# EAGLE board Segway (EAGLE 6.5.0)
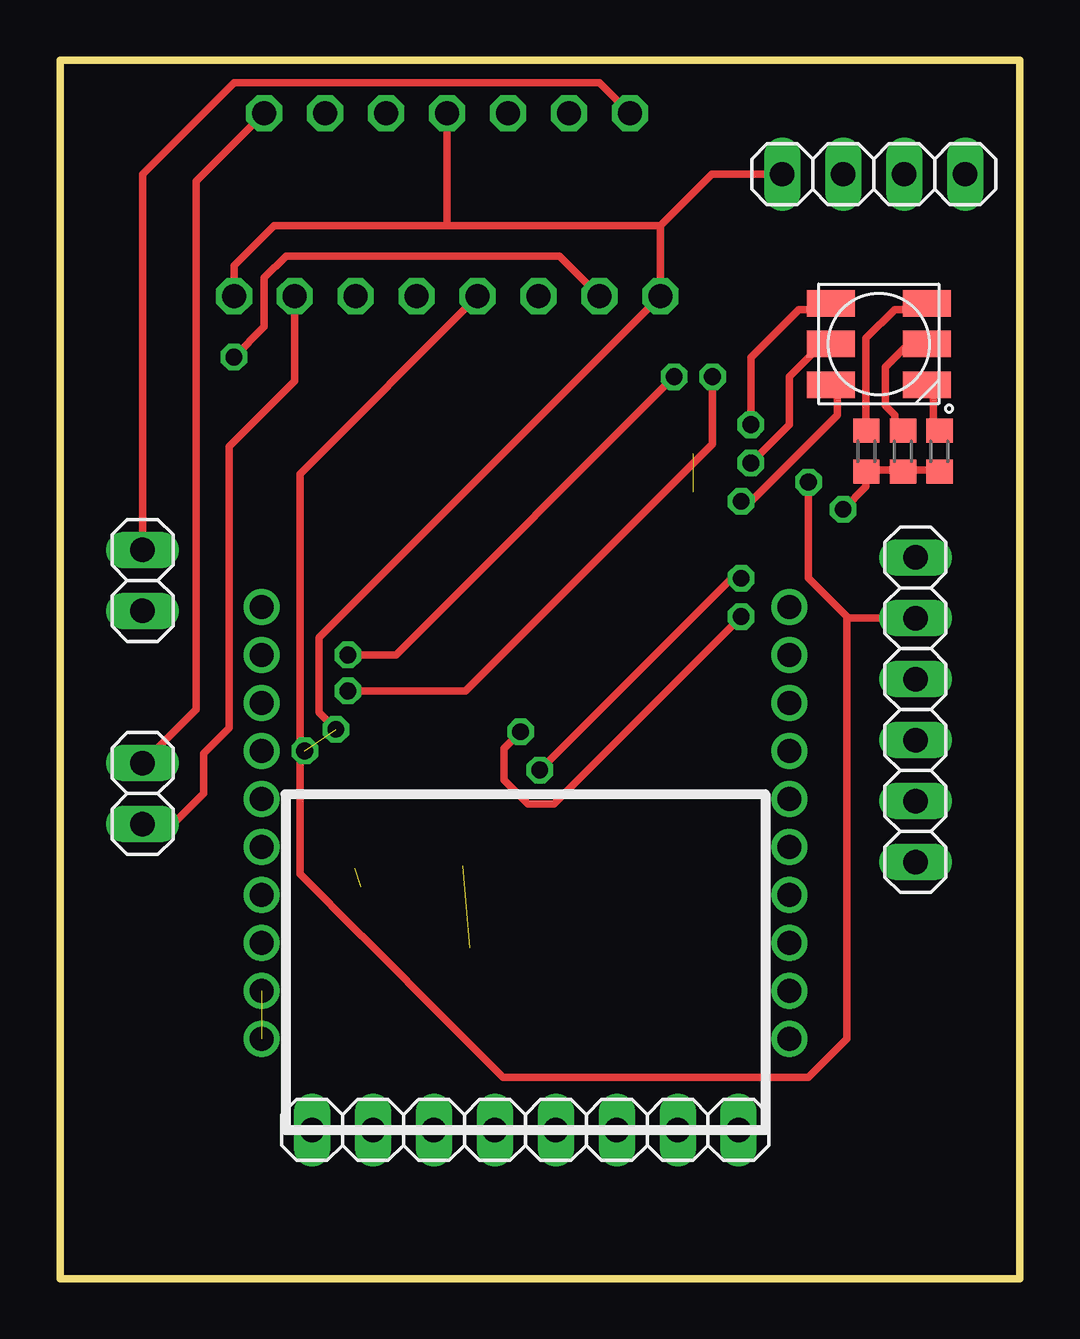
[diagram p0: board, top side]
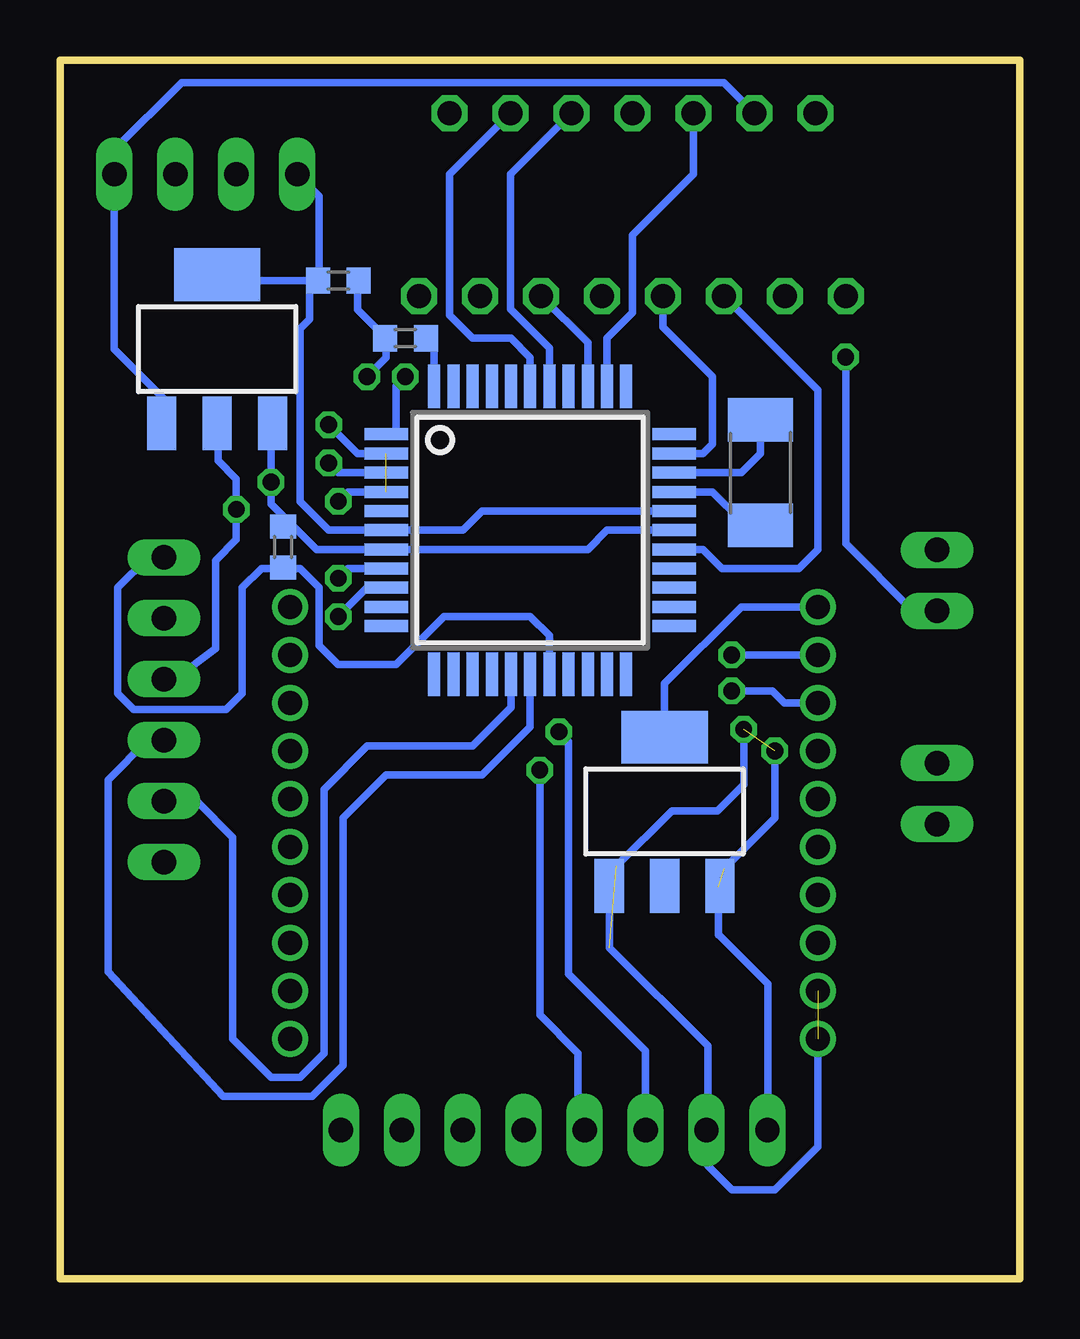
[diagram p1: board, bottom side, seen from below]

Size 40 x 50.8 mm. Coordinates in mm from the lower left corner, seen from the top.
Outline: 0,0 0,50.8 40,50.8 40,0 0,0
Copper layers (1*16): Top 0.035mm / dielectric 1.5mm / Bottom 0.035mm
Design rules "default": minimum track width 10mil, minimum drill 24mil, track to track 8mil, track to pad 8mil, pad to pad 8mil, via to via 8mil, smd to smd 8mil, copper to edge 40mil, drill to drill 8mil, minimum pad ring 10mil, minimum via ring 8mil, stop-mask expansion 4mil, vias tented up to drill 0mil, thermal gap 10mil

## Footprints (pad centres in the part's own frame; a part is rotated, then mirrored left to right if it is on the bottom)
SQFP-S-10X10-44 = smd 0.5 x 1.8: 1 -4,-6; 2 -3.2,-6; 3 -2.4,-6; 4 -1.6,-6; 5 -0.8,-6; 6 0,-6; 7 0.8,-6; 8 1.6,-6; 9 2.4,-6; 10 3.2,-6; 11 4,-6; 23 4,6; 24 3.2,6; 25 2.4,6; 26 1.6,6; 27 0.8,6; 28 0,6; 29 -0.8,6; 30 -1.6,6; 31 -2.4,6; 32 -3.2,6; 33 -4,6 | smd 1.8 x 0.5: 12 6,-4; 13 6,-3.2; 14 6,-2.4; 15 6,-1.6; 16 6,-0.8; 17 6,0; 18 6,0.8; 19 6,1.6; 20 6,2.4; 21 6,3.2; 22 6,4; 34 -6,4; 35 -6,3.2; 36 -6,2.4; 37 -6,1.6; 38 -6,0.8; 39 -6,0; 40 -6,-0.8; 41 -6,-1.6; 42 -6,-2.4; 43 -6,-3.2; 44 -6,-4
RGBLED5050 = smd 2 x 1.1: 1 -2,1.7; 2 -2,0; 3 -2,-1.7; 4 2,-1.7; 5 2,0; 6 2,1.7
1X06 = drill 1.016 long: 1 -6.35,0; 2 -3.81,0; 3 -1.27,0; 4 1.27,0; 5 3.81,0; 6 6.35,0
SOT223 = smd 1.219 x 2.235: 1 -2.311,-3.099; 2 0,-3.099; 3 2.311,-3.099 | smd 3.6 x 2.2: 4 0,3.099
R0603 = smd 1 x 1.1: 1 -0.85,0; 2 0.85,0
R2010 = smd 1.8 x 2.7: 1 -2.2,0; 2 2.2,0
1X04 = drill 1.016 long: 1 -3.81,0; 2 -1.27,0; 3 1.27,0; 4 3.81,0
1X02 = drill 1.016 long: 1 -1.27,0; 2 1.27,0
1X08 = drill 1.016 long: 1 -8.89,0; 2 -6.35,0; 3 -3.81,0; 4 -1.27,0; 5 1.27,0; 6 3.81,0; 7 6.35,0; 8 8.89,0

## Placement (x,y rotation side)
E$1  [SQFP-S-10X10-44]  20.4,31.2 270 bottom
E$2  [RGBLED5050]  34.13,38.96 0 top
E$3  [1X06]  35.66,23.72 90 top
E$4  [SOT223]  14.8,19.47 0 bottom
E$5  [R0603]  33.62,34.49 90 top
E$6  [R2010]  10.8,33.6 270 bottom
E$7  [R0603]  25.6,39.2 0 bottom
E$8  [1X04]  33.92,46.04 0 top
E$9  [R0603]  28.4,41.6 180 bottom
E$10  [SOT223]  33.45,38.75 0 bottom
E$11  [1X02]  3.44,29.11 90 top
E$12  [1X02]  3.44,20.22 90 top
E$13  [R0603]  30.7,30.5 90 bottom
E$14  [R0603]  35.14,34.49 90 top
E$15  [R0603]  36.66,34.49 90 top
E$16  [1X08]  19.4,6.2 0 top

## Library data of the parts
E$1 E$4-E$7 E$9 E$10 E$13-E$15 = smd-ipc
E$2 = adafruit
E$3 E$8 E$11 E$12 E$16 = pinhead

## Nets
S$3: E$8.4
S$10: E$1.8
S$21: E$1.31
S$23: E$1.7 E$1.28
S$24: E$1.30
S$25: E$1.27
S$27: E$3.5
S$28: E$3.6
S$29: E$1.17 E$3.3
S$30: E$1.16 E$3.2
S$31: E$3.4
S$35: E$1.6 E$1.29 E$8.1
S$36: E$1.44
S$41: E$1.2 E$1.3 E$1.4
S$42: E$1.9
S$56: E$12.1
S$58: E$1.32
S$60: E$1.36
S$61: E$11.1
S$63: E$12.2
S$65: E$1.35
S$67: E$1.38
S$69: E$11.2

## Tracks (layer width: path | path; a pad name or v marks a point on that pad's centre or on a via)
S$1  (via drill 1)
  Bottom 0.305: v8.4,28 11.6,28 14.8,24.8 14.8,22.98
S$2  (via drill 0.7, 1)  (4 unrouted)
  Bottom 0.305: 12.55,14.32 12.55,16.32 | v8.4,10 8.4,5.5 10.2,3.7 12,3.7 13,4.7 13,9.7 17.1,13.8 17.1,16.4 | v10.2,22 10.2,19.2 12.3,17.1 | v11.5,22.9 11.5,20.6 12.6,19.5 14.5,19.5 16.8,17.2
  other vias: 8.4,12
S$3  (via drill 1)
  Bottom 0.305: v11.06,48.58 12.33,49.85 34.94,49.85 37.73,47.06 E$8.4 37.73,38.75 35.59,36.61
S$4  (via drill 1)
  other vias: 8.4,22
S$5  (via drill 1)
  other vias: 8.4,20
S$6  (via drill 1)
  other vias: 8.4,18
S$7  (via drill 1)
  other vias: 8.4,16
S$8  (via drill 1)
  other vias: 8.4,14
S$9
  Bottom 0.305: 12.5,14.3 10.5,12.3 10.5,6.3
S$10  (via drill 0.7)
  Top 0.305: v20,21.2 28,29.2 v28.4,29.2
  Bottom 0.305: v20,21.2 20,11 18.4,9.4 18.4,6.4 | E$1.8 28,29.6 v28.4,29.2
S$11  (via drill 1)
  other vias: 30.4,28
S$12  (via drill 1)
  other vias: 30.4,26
S$13  (via drill 1)
  other vias: 30.4,24
S$14  (via drill 1)
  other vias: 30.4,22
S$15  (via drill 1)
  other vias: 30.4,20
S$16  (via drill 1)
  other vias: 30.4,18
S$17  (via drill 1)
  other vias: 30.4,16
S$18  (via drill 1)
  other vias: 30.4,14
S$19  (via drill 1)
  other vias: 30.4,12
S$20  (via drill 1)
  other vias: 30.4,10
S$21
  Bottom 0.305: E$1.31 11.6,33.6 10.8,34.4 10.8,35.6
S$22
  Top 0.305: 34.8,35.2 34.8,36 34.4,36.4 34.4,38 35.2,38.8 36.4,38.8
S$23
  Bottom 0.305: E$1.28 17.2,31.2 18,30.4 E$1.7
S$24
  Bottom 0.305: E$1.30 12.8,32.8 11.6,31.6
S$25  (via drill 1)
  Bottom 0.305: E$1.27 13.2,30.4 12.4,29.6 9.2,29.6 8.4,30.4 8.4,37.03 v12.33,40.96
S$27  (via drill 0.7)
  Top 0.305: E$3.5 32.87,27.53 31.2,29.2 v31.2,33.2
  Bottom 0.305: 26.8,30.4 29.3,30.4 31.2,32.3 v31.2,33.2 31.2,35.6
S$28
  Bottom 0.305: 19.6,25.6 19.6,26.8 20.4,27.6 24,27.6 26,25.6 28.4,25.6 29.2,26.4 29.2,28.8 30,29.6 31.6,29.6 32.4,28.8 32.4,24.4 33.08,23.72 36.93,23.72 37.6,24.39 37.6,28.8 36.33,30.07 E$3.6
S$29
  Bottom 0.305: E$1.17 20.4,23 22.4,21 26.4,21 28.2,19.2 28.2,8.9 29.5,7.6 33.2,7.6 38,12.8 38,20.8 36.35,22.45 E$3.3
S$30
  Bottom 0.305: E$3.2 34.31,19.91 32.8,18.4 32.8,10 31.2,8.4 30,8.4 29,9.4 29,20.4 27.2,22.2 22.8,22.2 21.2,23.8 E$1.16
S$31  (via drill 0.7)
  Top 0.305: v32.65,32.07 33.6,33.02 33.6,33.6
  Bottom 0.305: E$3.4 35.19,24.99 33.52,26.26 33.52,29.93 32.65,30.8 v32.65,32.07 32.65,33.34 33.41,34.1 33.41,35.37
S$32
  Bottom 0.305: 26.4,39.2 27.6,40.4 27.6,41.6
S$33  (via drill 0.7, 1)
  Top 0.305: v25.6,37.6 14,26 v12,26
  Bottom 0.305: v12,26 v8.4,26 | v25.6,37.6 26,37.2 26,35.2
S$34  (via drill 1)
  Top 0.305: v17.41,40.96 10,33.55 10,16.87 12.58,14.29 16.39,10.48 18.47,8.4 31.2,8.4 32.8,10 32.8,27.6
S$35  (via drill 1)
  Top 0.305: v7.25,40.96 7.25,42.23 8.92,43.9 16.14,43.9 | 16.14,43.9 25.03,43.9 | 25.03,43.9 v25.03,40.96 10.8,26.73 10.8,23.6 11.5,22.9 | v16.14,48.58 16.14,43.9 | E$8.1 27.17,46.04 25.03,43.9
  Bottom 0.305: E$1.29 22.4,32 23.2,31.2 E$1.6 28.8,31.2 30,32.4 30,39.6 29.6,40 29.6,41.6 | 29.6,41.6 29.2,41.6 29.2,45.13 E$8.1 | 29.6,41.6 32.4,41.6
S$36
  Bottom 0.305: 24.4,39.2 E$1.44
S$37  (via drill 0.7, 1)
  Top 0.305: v27.2,37.6 27.2,34.8 16.9,24.5 v12,24.5
  Bottom 0.305: 26.4,38.8 26.4,38.4 v27.2,37.6 | v12,24.5 10.3,24.5 9.8,24 v8.4,24
S$38
  Top 0.305: 33.6,35.2 33.6,39.2 34.8,40.4 36,40.4
S$39
  Top 0.305: 36.4,35.2 36.4,37.2
S$40
  Top 0.305: 33.37,33.7 36.97,33.7
S$41  (via drill 0.7)  (2 unrouted)
  Top 0.305: v28.8,35.6 28.8,38.4 30.8,40.4 32.8,40.4 | v28.8,34 30.4,35.6 30.4,37.6 31.6,38.8 32.8,38.8 | v28.4,32.4 28.8,32.4 32.4,36 32.4,37.2
  Bottom 0.305: E$1.2 27.6,34.4 v28.8,35.6 | E$1.3 28.4,33.6 v28.8,34 | E$1.4 28,32.8 v28.4,32.4
S$42  (via drill 0.7)
  Top 0.305: v28.4,27.6 20.6,19.8 19.5,19.8 18.5,20.8 18.5,22.1 v19.2,22.8
  Bottom 0.305: E$1.9 27.2,28.8 v28.4,27.6 | v19.2,22.8 18.8,22.4 18.8,12.7 15.6,9.5 15.6,6.4
S$56  (via drill 1)
  Top 0.305: v9.79,40.96 9.79,37.42 7.05,34.68 7.05,22.96 5.98,21.89 5.98,20.22 4.71,18.95 E$12.1
S$58  (via drill 1)
  Bottom 0.305: v14.87,40.96 14.87,39.67 12.8,37.6 12.8,34.8 13.2,34.4 E$1.32
S$60  (via drill 1)
  Bottom 0.305: v19.95,40.96 18,39.01 E$1.36
S$61  (via drill 0.7, 1)
  Top 0.305: v22.49,40.96 20.82,42.63 9.43,42.63 8.52,41.72 8.52,39.69 v7.25,38.42
  Bottom 0.305: v7.25,38.42 7.25,30.63 4.46,27.84 E$11.1
S$63  (via drill 1)
  Top 0.305: v8.52,48.58 5.68,45.74 5.68,23.73 E$12.2
S$65  (via drill 1)
  Bottom 0.305: v13.6,48.58 13.6,46.04 16.14,43.5 16.14,40.26 17.2,39.2 E$1.35
S$67  (via drill 1)
  Bottom 0.305: v18.68,48.58 21.22,46.04 21.22,40.42 19.6,38.8 E$1.38
S$68  (via drill 1)
  Bottom 0.305: v21.22,48.58 23.76,46.04 23.76,40.16 22.8,39.2 21.2,39.2 20.4,38.4 20.4,37.2
S$69  (via drill 1)
  Top 0.305: v23.76,48.58 22.49,49.85 7.25,49.85 3.44,46.04 E$11.2